# EAGLE board Memory V1.2 (EAGLE 9.6.2)
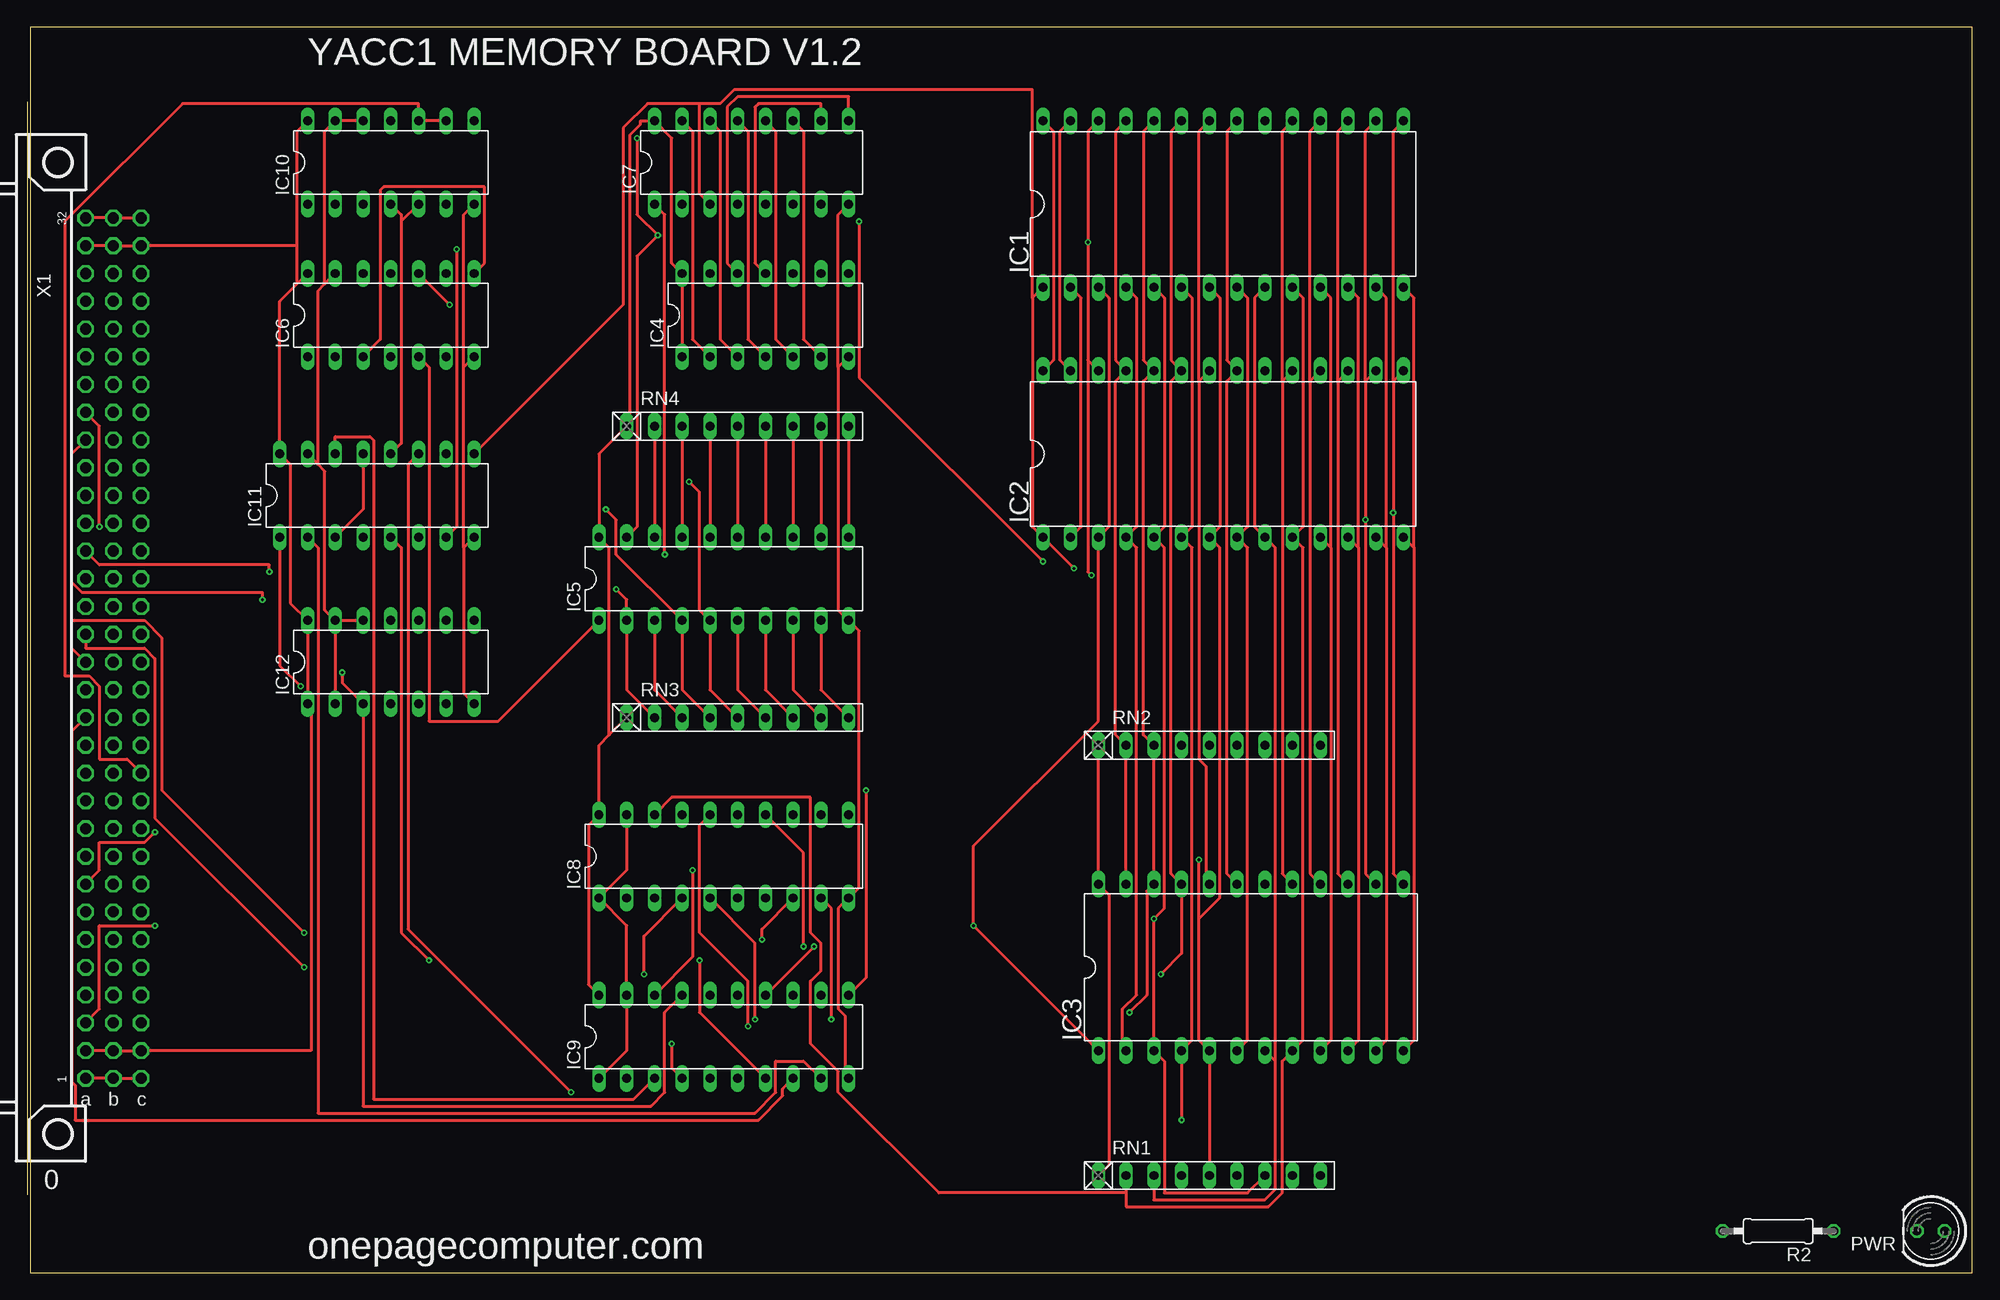
[diagram p0: board, top side]
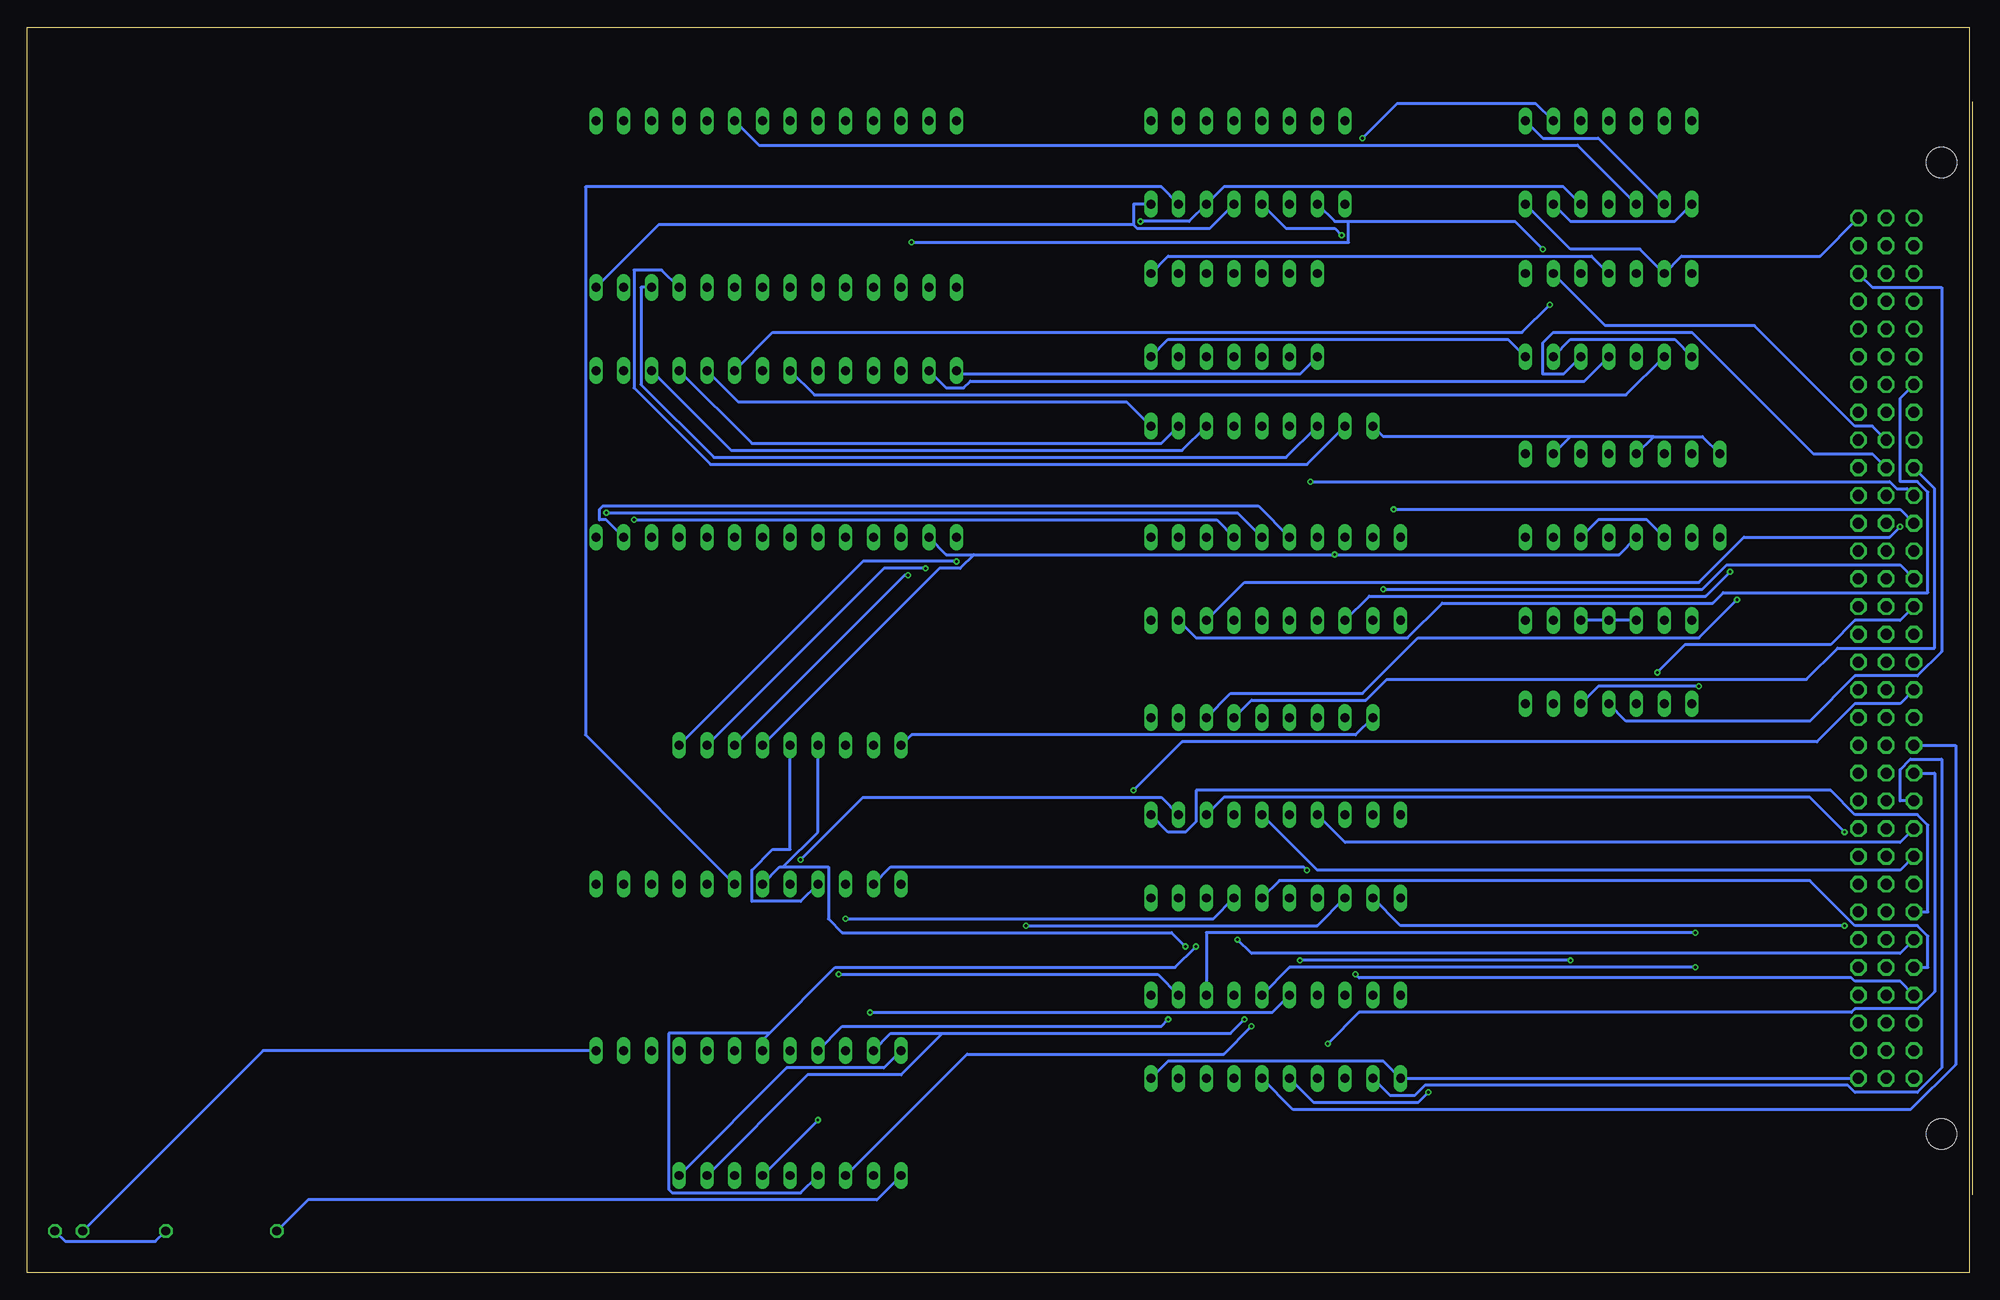
[diagram p1: board, bottom side, seen from below]

Size 177.78 x 113.97 mm. Coordinates in mm from the lower left corner, seen from the top.
Outline: 0,0 177.78,0 177.78,113.97 0,113.97 0,0
Copper layers (1*16): Top 0.035559375mm / dielectric 1.6mm / Bottom 0.035559375mm
Design rules "oshpark-2layer-auto-routing": minimum track width 10mil, minimum drill 10mil, track to track 10mil, track to pad 8mil, pad to pad 8mil, via to via 8mil, smd to smd 6mil, copper to edge 15mil, drill to drill 6mil, minimum pad ring 6mil, minimum via ring 6mil, stop-mask expansion 2.5mil, vias tented up to drill 0mil, thermal gap 10mil
Net classes: 1 GND: width 1 mm; 2 5V: width 1 mm

## Footprints (pad centres in the part's own frame; a part is rotated, then mirrored left to right if it is on the bottom)
DIL28-6 = drill 0.813 long: 1 -16.51,-7.62; 2 -13.97,-7.62; 3 -11.43,-7.62; 4 -8.89,-7.62; 5 -6.35,-7.62; 6 -3.81,-7.62; 7 -1.27,-7.62; 8 1.27,-7.62; 9 3.81,-7.62; 10 6.35,-7.62; 11 8.89,-7.62; 12 11.43,-7.62; 13 13.97,-7.62; 14 16.51,-7.62; 15 16.51,7.62; 16 13.97,7.62; 17 11.43,7.62; 18 8.89,7.62; 19 6.35,7.62; 20 3.81,7.62; 21 1.27,7.62; 22 -1.27,7.62; 23 -3.81,7.62; 24 -6.35,7.62; 25 -8.89,7.62; 26 -11.43,7.62; 27 -13.97,7.62; 28 -16.51,7.62
DIL24 = drill 0.813 long: 1 -13.97,-7.62; 2 -11.43,-7.62; 3 -8.89,-7.62; 4 -6.35,-7.62; 5 -3.81,-7.62; 6 -1.27,-7.62; 7 1.27,-7.62; 8 3.81,-7.62; 9 6.35,-7.62; 10 8.89,-7.62; 11 11.43,-7.62; 12 13.97,-7.62; 13 13.97,7.62; 14 11.43,7.62; 15 8.89,7.62; 16 6.35,7.62; 17 3.81,7.62; 18 1.27,7.62; 19 -1.27,7.62; 20 -3.81,7.62; 21 -6.35,7.62; 22 -8.89,7.62; 23 -11.43,7.62; 24 -13.97,7.62
DIL14 = drill 0.813 long: 1 -7.62,-3.81; 2 -5.08,-3.81; 3 -2.54,-3.81; 4 0,-3.81; 5 2.54,-3.81; 6 5.08,-3.81; 7 7.62,-3.81; 8 7.62,3.81; 9 5.08,3.81; 10 2.54,3.81; 11 0,3.81; 12 -2.54,3.81; 13 -5.08,3.81; 14 -7.62,3.81
DIL20 = drill 0.813 long: 1 -11.43,-3.81; 2 -8.89,-3.81; 3 -6.35,-3.81; 4 -3.81,-3.81; 5 -1.27,-3.81; 6 1.27,-3.81; 7 3.81,-3.81; 8 6.35,-3.81; 9 8.89,-3.81; 10 11.43,-3.81; 11 11.43,3.81; 12 8.89,3.81; 13 6.35,3.81; 14 3.81,3.81; 15 1.27,3.81; 16 -1.27,3.81; 17 -3.81,3.81; 18 -6.35,3.81; 19 -8.89,3.81; 20 -11.43,3.81
DIL16 = drill 0.813 long: 1 -8.89,-3.81; 2 -6.35,-3.81; 3 -3.81,-3.81; 4 -1.27,-3.81; 5 1.27,-3.81; 6 3.81,-3.81; 7 6.35,-3.81; 8 8.89,-3.81; 9 8.89,3.81; 10 6.35,3.81; 11 3.81,3.81; 12 1.27,3.81; 13 -1.27,3.81; 14 -3.81,3.81; 15 -6.35,3.81; 16 -8.89,3.81
LED5MM = drill 0.813 octagon: A -1.27,0; K 1.27,0
0207/10 = drill 0.813 octagon: 1 -5.08,0; 2 5.08,0
RN-9 = drill 0.813 long: 1 -10.16,0; 2 -7.62,0; 3 -5.08,0; 4 -2.54,0; 5 0,0; 6 2.54,0; 7 5.08,0; 8 7.62,0; 9 10.16,0
FABC96R = drill 1.016 octagon: A1 -2.54,39.37; A2 -2.54,36.83; A3 -2.54,34.29; A4 -2.54,31.75; A5 -2.54,29.21; A6 -2.54,26.67; A7 -2.54,24.13; A8 -2.54,21.59; A9 -2.54,19.05; A10 -2.54,16.51; A11 -2.54,13.97; A12 -2.54,11.43; A13 -2.54,8.89; A14 -2.54,6.35; A15 -2.54,3.81; A16 -2.54,1.27; A17 -2.54,-1.27; A18 -2.54,-3.81; A19 -2.54,-6.35; A20 -2.54,-8.89; A21 -2.54,-11.43; A22 -2.54,-13.97; A23 -2.54,-16.51; A24 -2.54,-19.05; A25 -2.54,-21.59; A26 -2.54,-24.13; A27 -2.54,-26.67; A28 -2.54,-29.21; A29 -2.54,-31.75; A30 -2.54,-34.29; A31 -2.54,-36.83; A32 -2.54,-39.37; B1 -5.08,39.37; B2 -5.08,36.83; B3 -5.08,34.29; B4 -5.08,31.75; B5 -5.08,29.21; B6 -5.08,26.67; B7 -5.08,24.13; B8 -5.08,21.59; B9 -5.08,19.05; B10 -5.08,16.51; B11 -5.08,13.97; B12 -5.08,11.43; B13 -5.08,8.89; B14 -5.08,6.35; B15 -5.08,3.81; B16 -5.08,1.27; B17 -5.08,-1.27; B18 -5.08,-3.81; B19 -5.08,-6.35; B20 -5.08,-8.89; B21 -5.08,-11.43; B22 -5.08,-13.97; B23 -5.08,-16.51; B24 -5.08,-19.05; B25 -5.08,-21.59; B26 -5.08,-24.13; B27 -5.08,-26.67; B28 -5.08,-29.21; B29 -5.08,-31.75; B30 -5.08,-34.29; B31 -5.08,-36.83; B32 -5.08,-39.37; C1 -7.62,39.37; C2 -7.62,36.83; C3 -7.62,34.29; C4 -7.62,31.75; C5 -7.62,29.21; C6 -7.62,26.67; C7 -7.62,24.13; C8 -7.62,21.59; C9 -7.62,19.05; C10 -7.62,16.51; C11 -7.62,13.97; C12 -7.62,11.43; C13 -7.62,8.89; C14 -7.62,6.35; C15 -7.62,3.81; C16 -7.62,1.27; C17 -7.62,-1.27; C18 -7.62,-3.81; C19 -7.62,-6.35; C20 -7.62,-8.89; C21 -7.62,-11.43; C22 -7.62,-13.97; C23 -7.62,-16.51; C24 -7.62,-19.05; C25 -7.62,-21.59; C26 -7.62,-24.13; C27 -7.62,-26.67; C28 -7.62,-29.21; C29 -7.62,-31.75; C30 -7.62,-34.29; C31 -7.62,-36.83; C32 -7.62,-39.37 | hole 2.794: 0,-44.456; 0,44.456

## Placement (x,y rotation side)
IC1  [DIL28-6]  109.22,97.79 0 top
IC2  [DIL28-6]  109.22,74.93 0 top
IC3  [DIL24]  111.76,27.94 0 top
IC4  74ALS30N  [DIL14]  67.31,87.63 0 top
IC5  74LS245N  [DIL20]  63.5,63.5 0 top
IC6  74LS04N  [DIL14]  33.02,87.63 0 top
IC7  74LS138N  [DIL16]  66.04,101.6 0 top
IC8  74LS244N  [DIL20]  63.5,38.1 0 top
IC9  74LS244N  [DIL20]  63.5,21.59 0 top
IC10  74ALS00N  [DIL14]  33.02,101.6 0 top
IC11  74LS157N  [DIL16]  31.75,71.12 0 top
IC12  74LS74N  [DIL14]  33.02,55.88 0 top
PWR  [LED5MM]  173.99,3.81 180 top
R2  330  [0207/10]  160.02,3.81 180 top
RN1  [RN-9]  107.95,8.89 0 top
RN2  [RN-9]  107.95,48.26 0 top
RN3  [RN-9]  64.77,50.8 0 top
RN4  [RN-9]  64.77,77.47 0 top
X1  FABC96R  [FABC96R]  2.54,57.15 180 top

## Library data of the parts
IC1 IC2 = memory-hitachi; OC_FARNELL: unknown; OC_NEWARK: unknown
IC3 = memory
IC4 IC6-IC12 = 74xx-us
IC5 = adafruit
PWR = led
R2 = eagle-ltspice; SPICEMODEL: NONE; SPICEPREFIX: R
RN1-RN4 = resistor-net; OC_FARNELL: unknown; OC_NEWARK: unknown
X1 = con-vg

## Nets
-AC-LD: X1.C22
-AC-LD-INV: X1.C20
-AC-RD: X1.C21
-ADDR-REG-LD0: X1.C4
-ADDR-REG-LD1: X1.C6
-ADDR-REG-RD0: X1.C3
-ADDR-REG-RD1: X1.C5
-ALU-FUNC: X1.C15
-BUS-EN: X1.C28
-HI-RAM: IC2.20 IC6.10
-HL-SWAP: X1.C25
-IN: X1.C26
-INT: X1.C13
-INTA: X1.C14
-IO-ADDR-LD: X1.C11
-IO-RD: X1.B25
-IO-WR: X1.B26
-LO-RAM: IC1.20 IC10.3
-MEM-RD: IC5.1 IC6.5 X1.B23
-MEM-WR: IC6.9 X1.B24
-OUT: X1.C27
-REG-DN: X1.B21
-REG-FUNC-LD: X1.B8
-REG-FUNC-RD: X1.B7
-REG-LD-HI: X1.B20
-REG-LD-LO: X1.B18
-REG-RD-HI: X1.B19
-REG-RD-LO: X1.B17
-REG-UP: X1.B22
-RESET: IC12.4 X1.C30
-ROM: IC3.18 IC7.7
-RUN: X1.C29
-SR-LD: X1.C23
-TMP-REG-LD0: X1.B28
-TMP-REG-LD1: X1.B30
-TMP-REG-RD0: X1.B27
-TMP-REG-RD1: X1.B29
-VMA: IC5.19 IC7.4 IC10.9 IC10.10 X1.C12
ADDR0: IC8.2 X1.A3
ADDR1: IC8.4 X1.A4
ADDR2: IC8.6 X1.A5
ADDR3: IC8.8 X1.A6
ADDR4: IC8.11 X1.A7
ADDR5: IC8.13 X1.A8
ADDR6: IC8.15 X1.A9
ADDR7: IC8.17 X1.A10
ADDR8: IC9.2 X1.A11
ADDR9: IC9.4 X1.A12
ADDR10: IC9.6 X1.A13
ADDR11: IC9.8 X1.A14
ADDR12: IC9.11 X1.A15
ADDR13: IC9.13 X1.A16
ADDR14: IC9.15 X1.A17
ADDR15: IC9.17 IC12.3 X1.A18
ALU0: X1.C16
ALU1: X1.C17
ALU2: X1.C18
ALU3: X1.C19
BADDR0: IC1.10 IC2.10 IC3.8 IC8.18 RN1.2
BADDR1: IC1.9 IC2.9 IC3.7 IC8.16 RN1.3
BADDR2: IC1.8 IC2.8 IC3.6 IC8.14 RN1.4
BADDR3: IC1.7 IC2.7 IC3.5 IC8.12 RN1.5
BADDR4: IC1.6 IC2.6 IC3.4 IC8.9 RN1.6
BADDR5: IC1.5 IC2.5 IC3.3 IC8.7 RN1.7
BADDR6: IC1.4 IC2.4 IC3.2 IC8.5 RN1.8
BADDR7: IC1.3 IC2.3 IC3.1 IC8.3 RN1.9
BADDR8: IC1.25 IC2.25 IC3.23 IC9.18 RN2.2
BADDR9: IC1.24 IC2.24 IC3.22 IC9.16 RN2.3
BADDR10: IC1.21 IC2.21 IC3.19 IC9.14 RN2.4
BADDR11: IC1.23 IC2.23 IC3.21 IC9.12 RN2.5
BADDR12: IC1.2 IC2.2 IC7.1 IC11.4 RN2.6
BADDR13: IC1.26 IC2.26 IC7.2 IC11.7 RN2.7
BADDR14: IC1.1 IC2.1 IC7.3 IC11.9 RN2.8
BADDR15: IC7.6 IC10.4 IC10.5 IC11.12 RN2.9
BDATA0: IC1.11 IC2.11 IC3.9 IC5.18 RN4.2
BDATA1: IC1.12 IC2.12 IC3.10 IC5.17 RN4.3
BDATA2: IC1.13 IC2.13 IC3.11 IC5.16 RN4.4
BDATA3: IC1.15 IC2.15 IC3.13 IC5.15 RN4.5
BDATA4: IC1.16 IC2.16 IC3.14 IC5.14 RN4.6
BDATA5: IC1.17 IC2.17 IC3.15 IC5.13 RN4.7
BDATA6: IC1.18 IC2.18 IC3.16 IC5.12 RN4.8
BDATA7: IC1.19 IC2.19 IC3.17 IC5.11 RN4.9
BR-COND: X1.C24
DATA0: IC5.2 RN3.2 X1.A19
DATA1: IC5.3 RN3.3 X1.A20
DATA2: IC5.4 RN3.4 X1.A21
DATA3: IC5.5 RN3.5 X1.A22
DATA4: IC5.6 RN3.6 X1.A23
DATA5: IC5.7 RN3.7 X1.A24
DATA6: IC5.8 RN3.8 X1.A25
DATA7: IC5.9 RN3.9 X1.A26
DATA8: X1.A27
DATA9: X1.A28
DATA10: X1.A29
DATA11: X1.A30
DATA12: X1.B3
DATA13: X1.B4
DATA14: X1.B5
DATA15: X1.B6
FORCE-ROM: IC11.1 IC12.5
GND: IC1.14 IC2.14 IC3.12 IC4.7 IC5.10 IC6.7 IC6.13 IC7.5 IC7.8 IC8.1 IC8.10 IC8.19 IC9.1 IC9.10 IC9.19 IC10.7 IC10.12 IC10.13 IC11.8 IC11.15 IC12.2 IC12.7 IC12.10 IC12.11 IC12.12 IC12.13 PWR.K X1.A1 X1.A32 X1.B1 X1.B32 X1.C1 X1.C32
IO-ADDR0: X1.C7
IO-ADDR1: X1.C8
IO-ADDR2: X1.C9
IO-ADDR3: X1.C10
MEM-RD: IC6.1 IC6.6
N$1: IC4.12 IC7.9
N$2: IC6.3 IC6.8
N$3: IC1.22 IC2.22 IC3.20 IC6.2
N$4: IC1.27 IC2.27 IC6.4
N$5: IC4.11 IC7.10
N$6: IC4.6 IC7.11
N$7: IC4.5 IC7.12
N$8: IC4.4 IC7.13
N$9: IC4.3 IC7.14
N$10: IC4.2 IC7.15
N$11: PWR.A R2.1
N$12: IC10.2 IC10.8
N$13: IC10.1 IC10.6
N$14: IC4.8 IC6.11
N$15: IC9.9 IC11.2
N$16: IC9.7 IC11.5
N$17: IC9.5 IC11.11
N$18: IC9.3 IC11.14
REG-LD-ID0: X1.B13
REG-LD-ID1: X1.B14
REG-LD-ID2: X1.B15
REG-LD-ID3: X1.B16
REG-RD-ID0: X1.B9
REG-RD-ID1: X1.B10
REG-RD-ID2: X1.B11
REG-RD-ID3: X1.B12
VCC: IC1.28 IC2.28 IC3.24 IC4.1 IC4.14 IC5.20 IC6.14 IC7.16 IC8.20 IC9.20 IC10.14 IC11.3 IC11.6 IC11.10 IC11.13 IC11.16 IC12.1 IC12.14 R2.2 RN1.1 RN2.1 RN3.1 RN4.1 X1.A2 X1.A31 X1.B2 X1.B31 X1.C2 X1.C31

## Tracks (layer width: path | path; a pad name or v marks a point on that pad's centre or on a via)
-HI-RAM  (via drill 0.25)
  Top 0.254: v38.42,88.58 IC6.10
  Bottom 0.254: v38.42,88.58 40.96,86.04 109.54,86.04 IC2.20
-LO-RAM
  Bottom 0.254: IC10.3 35.88,103.19 110.81,103.19 IC1.20
-MEM-RD
  Top 0.254: IC5.1 42.86,50.48 36.51,50.48 36.51,82.87 IC6.5
  Bottom 0.254: X1.B23 8.89,74.93 14.29,74.93 25.4,86.04 38.1,86.04 39.05,85.09 39.05,82.23 37.15,82.23 IC6.5
-MEM-WR
  Bottom 0.254: IC6.9 33.34,86.68 19.68,86.68 10.48,77.47 8.89,77.47 X1.B24
-RESET
  Bottom 0.254: IC12.4 31.43,50.48 14.61,50.48 10.48,54.61 4.76,54.61 2.54,56.83 2.54,90.17 8.89,90.17 X1.C30
-ROM
  Bottom 0.254: IC3.18 126.68,49.21 126.68,99.38 73.98,99.38 IC7.7
-VMA  (via drill 0.25)
  Top 0.254: IC5.19 55.56,68.26 55.56,93.03 v57.47,94.93 55.56,96.84 v55.56,103.82 | IC10.9 IC10.10 35.56,107 13.97,107 3.17,96.2 3.17,54.61 5.4,54.61 6.35,53.66 6.35,46.99 8.89,46.99 X1.C12
  Bottom 0.254: v57.47,94.93 58.1,95.57 62.55,95.57 IC7.4 | v55.56,103.82 52.39,107 39.69,107 IC10.9
ADDR0  (via drill 0.25)
  Top 0.254: v11.43,31.75 6.35,31.75 6.35,24.13 X1.A3
  Bottom 0.254: IC8.2 52.07,31.75 v11.43,31.75
ADDR1  (via drill 0.25)
  Top 0.254: IC8.4 56.2,30.8 v56.2,27.3
  Bottom 0.254: v56.2,27.3 55.88,26.99 10.79,26.99 10.48,26.67 6.35,26.67 X1.A4
ADDR2
  Bottom 0.254: IC8.6 63.18,35.88 14.61,35.88 10.48,31.75 4.76,31.75 3.81,30.8 3.81,27.94 X1.A5
ADDR3  (via drill 0.25)
  Top 0.254: IC8.8 66.99,31.43 v66.99,30.48
  Bottom 0.254: v66.99,30.48 65.72,29.21 6.35,29.21 X1.A6
ADDR4
  Bottom 0.254: IC8.11 73.34,40.32 71.75,40.32 70.8,41.27 70.8,44.13 12.7,44.13 10.48,41.91 4.76,41.91 3.81,40.96 3.81,33.02 X1.A7
ADDR5  (via drill 0.25)
  Top 0.254: v11.43,40.32 10.48,39.37 6.35,39.37 6.35,36.83 X1.A8
  Bottom 0.254: IC8.13 68.26,43.5 14.61,43.5 v11.43,40.32
ADDR6
  Bottom 0.254: IC8.15 59.69,36.83 6.35,36.83 X1.A9
ADDR7
  Bottom 0.254: IC8.17 57.15,39.37 6.35,39.37 X1.A10
ADDR8
  Bottom 0.254: IC9.2 53.02,16.19 50.8,16.19 49.85,17.14 11.11,17.14 10.48,16.51 4.76,16.51 2.54,18.73 2.54,46.99 5.4,46.99 6.35,46.04 6.35,43.18 X1.A11
ADDR9  (via drill 0.25)
  Top 0.254: IC9.4 58.74,18.73 v58.74,20.95
  Bottom 0.254: v58.74,20.95 55.88,23.81 10.79,23.81 10.48,24.13 4.76,24.13 3.17,25.72 3.17,45.72 X1.A12
ADDR10
  Bottom 0.254: IC9.6 61.91,14.92 5.4,14.92 1.27,19.05 1.27,48.26 X1.A13
ADDR11
  Top 0.254: IC9.8 68.9,16.83 68.9,16.19 66.67,13.97 4.13,13.97 4.13,17.14 3.81,17.46 3.81,49.53 X1.A14
ADDR12  (via drill 0.25)
  Top 0.254: IC9.11 76.52,26.99 v76.52,44.13
  Bottom 0.254: v76.52,44.13 72.07,48.58 13.97,48.58 10.48,52.07 6.35,52.07 X1.A15
ADDR13  (via drill 0.25)
  Top 0.254: v25.08,31.11 12.06,44.13 12.06,58.1 10.48,59.69 3.81,59.69 3.81,57.15 X1.A16
  Bottom 0.254: IC9.13 69.85,31.11 v25.08,31.11
ADDR14  (via drill 0.25)
  Top 0.254: v25.08,27.94 11.43,41.59 11.43,56.2 10.48,57.15 5.08,57.15 X1.A17
  Bottom 0.254: IC9.15 62.23,27.94 v25.08,27.94
ADDR15  (via drill 0.25)
  Top 0.254: v28.57,54.93 28.57,53.98 IC12.3 30.48,15.24 56.83,15.24 58.1,16.51 58.1,23.81 IC9.17
  Bottom 0.254: v28.57,54.93 26.04,57.47 12.7,57.47 10.48,59.69 6.35,59.69 X1.A18
BADDR0
  Top 0.254: IC1.10 116.52,89.22 116.52,68.26 IC2.10 116.52,66.36 116.52,21.27 IC3.8 114.62,19.37 114.62,7.3 113.35,6.03 100.33,6.03 100.33,7.3 | IC8.18 58.74,43.5 71.44,43.5 71.44,31.11 72.39,30.16 72.39,27.62 71.44,26.67 71.44,20.95 73.98,18.41 73.98,16.51 83.19,7.3 100.33,7.3 | RN1.2 100.33,7.3
BADDR1  (via drill 0.25)
  Top 0.254: IC1.9 112.08,89.22 112.08,68.26 IC2.9 113.98,66.36 113.98,19.37 | IC8.16 61.28,40.96 61.28,31.11 65.72,26.67 v65.72,22.54 | 113.98,19.37 IC3.7 | 113.98,19.37 113.98,7.62 113.03,6.67 102.87,6.67 RN1.3
  Bottom 0.254: v65.72,22.54 68.26,20 91.76,20 RN1.3
BADDR2  (via drill 0.25)
  Top 0.254: IC1.8 111.44,89.22 111.44,68.26 IC2.8 111.44,66.36 111.44,21.27 IC3.6 | IC8.14 70.8,38.42 v70.8,29.84
  Bottom 0.254: v70.8,29.84 72.71,27.94 103.82,27.94 109.86,21.91 | 109.86,21.91 110.49,21.27 IC3.6 | RN1.4 107,7.3 118.75,7.3 119.06,7.62 119.06,21.91 109.86,21.91
BADDR3  (via drill 0.25)
  Top 0.254: IC1.7 108.9,89.22 108.9,68.26 IC2.7 108.9,66.36 108.9,34.29 107,32.38 | 107,32.38 107,21.27 IC3.5 RN1.5 | 107,32.38 v107,37.78
  Bottom 0.254: IC8.12 73.98,43.5 101.28,43.5 v107,37.78
BADDR4  (via drill 0.25)
  Top 0.254: IC1.6 106.36,89.22 106.36,68.26 IC2.6 106.36,66.36 106.36,21.27 IC3.4 v105.41,13.97 | IC8.9 73.34,33.34 v73.34,23.18
  Bottom 0.254: v73.34,23.18 73.98,22.54 103.19,22.54 IC3.4 | v105.41,13.97 RN1.6
BADDR5  (via drill 0.25)
  Top 0.254: IC1.5 103.82,89.22 103.82,68.26 IC2.5 103.82,66.36 103.82,33.34 v102.87,32.38 IC3.3 103.82,19.37 103.82,7.3 111.44,7.3 RN1.7
  Bottom 0.254: IC8.7 69.22,32.38 v102.87,32.38
BADDR6  (via drill 0.25)
  Top 0.254: IC1.4 101.28,89.22 101.28,68.26 IC2.4 101.28,66.36 101.28,25.4 100.01,24.13 100.01,20.64 IC3.2 | IC8.5 66.36,30.16 v66.36,23.18
  Bottom 0.254: v66.36,23.18 67.63,21.91 93.98,21.91 | 93.98,21.91 98.74,21.91 IC3.2 | RN1.8 106.36,18.1 97.79,18.1 93.98,21.91
BADDR7  (via drill 0.25)
  Top 0.254: IC1.3 98.74,89.22 98.74,68.26 IC2.3 97.79,50.48 86.36,39.05 v86.36,31.75 IC3.1
  Bottom 0.254: IC8.3 59.69,31.75 v86.36,31.75 | RN1.9 108.27,18.73 99.38,18.73 IC3.1
BADDR8  (via drill 0.25)
  Top 0.254: IC1.25 99.38,104.46 99.38,83.5 IC2.25 99.38,81.6 99.38,49.21 RN2.2 IC3.23 | IC9.18 60.64,28.89 v60.64,36.83
  Bottom 0.254: v60.64,36.83 60.96,37.15 98.74,37.15 IC3.23
BADDR9  (via drill 0.25)
  Top 0.254: IC1.24 101.92,104.46 101.92,83.5 IC2.24 101.92,81.6 101.92,49.21 RN2.3 IC3.22 102.23,34.92 102.23,25.4 v100.65,23.81
  Bottom 0.254: IC9.16 63.82,23.81 v100.65,23.81
BADDR10  (via drill 0.25)
  Top 0.254: IC1.21 109.54,104.46 109.54,83.5 IC2.21 109.54,81.6 109.54,36.51 IC3.19 | v71.75,29.84 IC9.14
  Bottom 0.254: v71.75,29.84 73.03,31.11 103.19,31.11 104.46,32.38 104.46,37.15 108.58,37.15 | 108.58,37.15 108.9,37.15 IC3.19 | RN2.4 105.41,40.32 108.58,37.15
BADDR11  (via drill 0.25)
  Top 0.254: IC1.23 104.46,104.46 104.46,83.5 IC2.23 104.46,81.6 104.46,36.51 IC3.21 105.41,29.21 v103.5,27.3
  Bottom 0.254: IC9.12 74.3,27.3 v103.5,27.3 | RN2.5 107.95,38.73 109.54,38.73 111.44,36.83 111.44,33.97 107,33.97 IC3.21
BADDR12  (via drill 0.25)
  Top 0.254: IC7.1 58.1,96.84 v58.1,65.72 | IC1.2 96.2,89.22 96.2,68.26 IC2.2
  Bottom 0.254: IC11.4 32.07,65.72 v58.1,65.72 91.12,65.72 | 91.12,65.72 93.66,65.72 IC2.2 | RN2.6 94.3,64.45 92.39,64.45 91.12,65.72
BADDR13  (via drill 0.25)
  Top 0.254: IC11.7 39.05,68.26 v39.05,93.66 | 96.84,83.5 IC2.26 | 96.84,83.5 v96.84,94.3 96.84,104.46 IC1.26 | v97.16,63.82 96.84,64.14 96.84,83.5
  Bottom 0.254: v39.05,93.66 41.59,96.2 56.83,96.2 | 56.83,96.2 58.1,96.2 IC7.2 | RN2.7 97.47,63.82 v97.16,63.82 | 56.83,96.2 56.83,94.3 v96.84,94.3
BADDR14  (via drill 0.25)
  Top 0.254: IC11.9 54.29,88.58 54.29,104.78 56.52,107 61.28,107 | 61.28,107 61.28,98.74 IC7.3 | 91.76,89.22 91.76,68.26 IC2.1 v95.57,64.45 | IC1.1 91.76,89.22 | 61.28,107 63.18,107 64.45,108.27 91.76,108.27 91.76,89.22
  Bottom 0.254: RN2.8 99.38,64.45 v95.57,64.45
BADDR15  (via drill 0.25)
  Top 0.254: IC11.12 33.97,75.88 33.97,96.2 | 33.97,96.2 33.97,96.84 IC10.4 | 33.97,96.2 IC10.5 | v92.71,65.09 75.88,81.92 v75.88,96.2
  Bottom 0.254: IC10.5 37.15,99.38 68.26,99.38 IC7.6 71.44,96.2 v75.88,96.2 | RN2.9 101.28,65.09 v92.71,65.09
BDATA0
  Top 0.254: RN4.2 IC5.18 | IC3.9 119.06,21.27 119.06,66.36 | IC2.11 119.06,66.36 | IC1.11 119.06,89.22 119.06,66.36
  Bottom 0.254: RN4.2 60.64,73.98 115.25,73.98 122.24,80.96 122.24,91.76 119.7,91.76 IC1.11
BDATA1
  Top 0.254: RN4.3 IC5.17 | IC3.10 121.6,21.27 121.6,66.36 | IC2.12 121.6,66.36 | IC1.12 121.6,89.22 121.6,66.36
  Bottom 0.254: RN4.3 62.55,74.61 114.94,74.61 121.6,81.28 121.6,90.17 IC1.12
BDATA2
  Top 0.254: RN4.4 IC5.16 | IC3.11 124.14,21.27 124.14,66.36 | IC2.13 124.14,66.36 | IC1.13 124.14,89.22 124.14,66.36
  Bottom 0.254: IC5.16 65.09,70.17 125.09,70.17 125.41,69.85 125.41,68.9 124.78,68.9 IC2.13
BDATA3  (via drill 0.25)
  Top 0.254: RN4.5 IC5.15 | IC3.13 124.78,36.51 v124.78,69.53 124.78,81.6 | IC2.15 124.78,81.6 | IC1.15 124.78,104.46 124.78,81.6
  Bottom 0.254: IC5.15 66.99,69.53 v124.78,69.53
BDATA4  (via drill 0.25)
  Top 0.254: RN4.6 IC5.14 | IC3.14 122.24,36.51 v122.24,68.9 122.24,81.6 | IC2.16 122.24,81.6 | IC1.16 122.24,104.46 122.24,81.6
  Bottom 0.254: IC5.14 68.9,68.9 v122.24,68.9
BDATA5
  Top 0.254: RN4.7 IC5.13 | IC3.15 119.7,36.51 119.7,81.6 | IC2.17 119.7,81.6 | IC1.17 119.7,104.46 119.7,81.6
  Bottom 0.254: RN4.7 72.07,75.25 113.35,75.25 IC2.17
BDATA6
  Top 0.254: RN4.8 IC5.12 | IC3.16 117.16,36.51 117.16,81.6 | IC2.18 117.16,81.6 | IC1.18 117.16,104.46 117.16,81.6
  Bottom 0.254: RN4.8 73.98,75.88 111.44,75.88 IC2.18
BDATA7
  Top 0.254: RN4.9 IC5.11 | IC3.17 114.62,36.51 114.62,81.6 | IC2.19 114.62,81.6 | IC1.19 114.62,104.46 114.62,81.6
  Bottom 0.254: RN4.9 77.15,79.69 112.71,79.69 IC2.19
DATA0  (via drill 0.25)
  Top 0.254: RN3.2 54.61,53.34 IC5.2 54.61,61.59 v53.66,62.55
  Bottom 0.254: X1.A19 6.35,64.77 22.23,64.77 24.45,62.55 v53.66,62.55
DATA1  (via drill 0.25)
  Top 0.254: RN3.3 57.15,53.34 IC5.3 | X1.A20 6.35,64.77 21.91,64.77 v21.91,64.14
  Bottom 0.254: v21.91,64.14 24.13,61.91 54.93,61.91 IC5.3
DATA2  (via drill 0.25)
  Top 0.254: RN3.4 59.69,53.34 IC5.4 53.66,65.72 53.66,68.9 v52.7,69.85
  Bottom 0.254: X1.A21 6.35,69.85 v52.7,69.85
DATA3  (via drill 0.25)
  Top 0.254: RN3.5 62.23,53.34 IC5.5 61.28,60.64 61.28,71.44 v60.33,72.39
  Bottom 0.254: X1.A22 5.71,71.75 6.67,71.75 7.3,72.39 v60.33,72.39
DATA4
  Top 0.254: RN3.6 64.77,53.34 IC5.6
  Bottom 0.254: X1.A23 3.17,71.75 3.17,57.15 12.06,57.15 14.92,54.29 53.34,54.29 55.24,52.39 65.72,52.39 RN3.6
DATA5  (via drill 0.25)
  Top 0.254: RN3.7 67.31,53.34 IC5.7 | X1.A24 3.81,74.93 3.81,63.18 4.76,62.23 21.27,62.23 v21.27,61.59
  Bottom 0.254: v21.27,61.59 24.77,58.1 50.48,58.1 55.56,53.02 67.63,53.02 RN3.7
DATA6  (via drill 0.25)
  Top 0.254: RN3.8 69.85,53.34 IC5.8 | X1.A25 6.35,77.47 v6.35,68.26
  Bottom 0.254: v6.35,68.26 7.3,67.31 20.64,67.31 24.77,63.18 66.36,63.18 IC5.8
DATA7
  Top 0.254: RN3.9 72.39,53.34 IC5.9
  Bottom 0.254: X1.A26 6.35,80.01 6.35,72.39 4.76,72.39 3.81,71.44 3.81,62.23 22.54,62.23 23.5,61.28 48.26,61.28 51.44,58.1 70.8,58.1 IC5.9
FORCE-ROM  (via drill 0.25)
  Top 0.254: v24.77,53.66 22.86,55.56 IC11.1
  Bottom 0.254: IC12.5 33.97,53.66 v24.77,53.66
GND
  Top 0.254: IC3.12 126.68,21.27 126.68,66.36 | IC2.14 126.68,66.36 | IC1.14 126.68,89.22 126.68,66.36 | IC12.7 39.69,53.02 39.69,66.36 | IC11.8 39.69,66.36 | 39.69,82.87 IC6.7 | 39.69,66.36 39.69,82.87 | IC10.7 39.69,96.84 39.69,82.87 | X1.A32 X1.B32 X1.C32 | IC10.12 IC10.13 26.99,104.46 26.99,90.49 | IC12.13 IC12.2 | IC12.13 IC12.12 | 26.35,73.98 26.99,73.34 26.99,60.64 IC12.13 | 26.35,73.98 IC11.15 | 26.99,90.49 26.35,89.85 26.35,73.98 | 26.99,90.49 IC6.13 | 73.98,82.87 73.98,60.64 IC5.10 75.88,58.74 75.88,35.24 IC8.10 73.98,33.34 73.98,24.13 74.61,23.5 74.61,18.1 IC9.10 | IC4.7 73.98,82.87 | IC7.8 73.98,96.84 73.98,82.87 | IC8.19 54.61,36.83 IC8.1 54.61,31.75 IC9.19 54.61,20.32 IC9.1 | X1.A1 X1.B1 X1.C1
  Bottom 0.254: PWR.K 156.21,20.32 IC3.12 | IC12.12 IC12.11 IC12.10 | X1.C32 13.65,93.03 26.35,93.03 IC6.13 30.16,93.66 36.51,93.66 IC10.7 | IC7.5 69.53,95.57 76.2,95.57 76.52,95.89 | 76.52,95.89 76.52,97.79 IC7.8 | X1.C1 IC9.1 53.66,19.37 73.34,19.37 IC9.10 | IC6.7 42.23,85.41 73.34,85.41 IC4.7 | IC1.14 120.02,95.89 76.52,95.89
MEM-RD
  Bottom 0.254: IC6.1 26.99,85.41 36.51,85.41 IC6.6
N$1
  Top 0.254: IC4.12 63.82,92.39 63.82,106.68 64.77,107.63 74.93,107.63 IC7.9
N$2
  Top 0.254: IC6.3 32.07,85.41 32.07,99.06 32.38,99.38 41.59,99.38 41.59,92.39 IC6.8
N$3
  Top 0.254: IC3.20 107.63,35.88 107.63,46.35 107,46.99 107,81.6 | IC2.22 107,81.6 | IC1.22 107,104.46 107,81.6
  Bottom 0.254: IC6.2 31.43,80.33 105.73,80.33 IC2.22
N$4
  Top 0.254: IC1.27 94.3,104.46 94.3,83.5 IC2.27
  Bottom 0.254: IC6.4 35.24,81.6 91.44,81.6 92.08,80.96 93.66,80.96 IC2.27
N$5
  Top 0.254: IC4.11 66.36,92.39 66.36,106.68 66.67,107 72.39,107 IC7.10
N$6
  Top 0.254: IC4.6 70.8,85.41 70.8,104.46 IC7.11
N$7
  Top 0.254: IC4.5 68.26,85.41 68.26,104.46 IC7.12
N$8
  Top 0.254: IC4.4 65.72,85.41 65.72,104.46 IC7.13
N$9
  Top 0.254: IC4.3 63.18,85.41 63.18,104.46 IC7.14
N$10
  Top 0.254: IC4.2 60.64,85.41 60.64,104.46 IC7.15
N$11
  Bottom 0.254: R2.1 166.05,2.86 174.31,2.86 PWR.A
N$12
  Bottom 0.254: IC10.2 33.97,103.82 39.05,103.82 IC10.8
N$13
  Bottom 0.254: IC10.1 26.99,96.2 36.51,96.2 IC10.6
N$14
  Bottom 0.254: IC6.11 34.61,93.03 73.34,93.03 IC4.8
N$15
  Top 0.254: IC9.9 70.8,19.37 68.26,19.37 68.26,16.51 66.36,14.61 26.35,14.61 26.35,66.36 IC11.2
N$16  (via drill 0.25)
  Top 0.254: IC9.7 61.28,23.81 v61.28,28.57 | v36.51,28.57 33.97,31.11 33.97,66.36 IC11.5
  Bottom 0.254: v36.51,28.57 v61.28,28.57
N$17  (via drill 0.25)
  Top 0.254: v49.53,16.51 34.61,31.43 34.61,73.98 IC11.11
  Bottom 0.254: IC9.5 60.01,15.56 50.48,15.56 v49.53,16.51
N$18
  Top 0.254: IC9.3 55.24,15.88 31.43,15.88 31.43,76.2 31.11,76.52 27.94,76.52 IC11.14
VCC
  Top 0.254: RN1.1 98.74,9.84 98.74,34.61 IC3.24 RN2.1 | X1.A2 X1.B2 X1.C2 25.72,20.32 25.72,51.75 IC12.1 IC12.14 23.81,61.28 23.81,73.98 IC11.16 22.86,88.9 24.45,90.49 | IC2.28 93.66,83.5 93.66,104.46 IC1.28 | IC4.1 IC4.14 58.74,92.39 58.74,103.82 IC7.16 55.88,105.41 55.88,105.09 54.93,104.14 54.93,77.79 RN4.1 52.07,74.93 IC5.20 53.02,66.36 53.02,49.21 | IC9.20 51.12,26.35 51.12,40.96 IC8.20 52.07,48.26 53.02,49.21 | 53.02,49.21 RN3.1 | X1.A31 X1.B31 X1.C31 24.45,93.98 | IC11.3 30.48,69.85 IC11.13 | 24.45,90.49 IC6.14 | IC10.14 24.45,104.46 24.45,93.98 | 24.45,90.49 24.45,93.98
  Bottom 0.254: R2.2 152.08,6.67 100.01,6.67 RN1.1 | IC2.28 92.39,82.23 61.28,82.23 IC4.1 | IC11.6 33.97,68.9 29.53,68.9 IC11.3 | IC11.16 24.45,76.52 28.89,76.52 | IC11.13 28.89,76.52 | 36.51,76.52 IC11.10 | 28.89,76.52 36.51,76.52 | RN4.1 53.66,76.52 36.51,76.52 | RN2.1 96.84,49.21 56.2,49.21 RN3.1

## Text on the board
tNames: YACC1 MEMORY BOARD V1.2 | 0 | onepagecomputer.com